# EAGLE board Sensor Board (EAGLE 6.4)
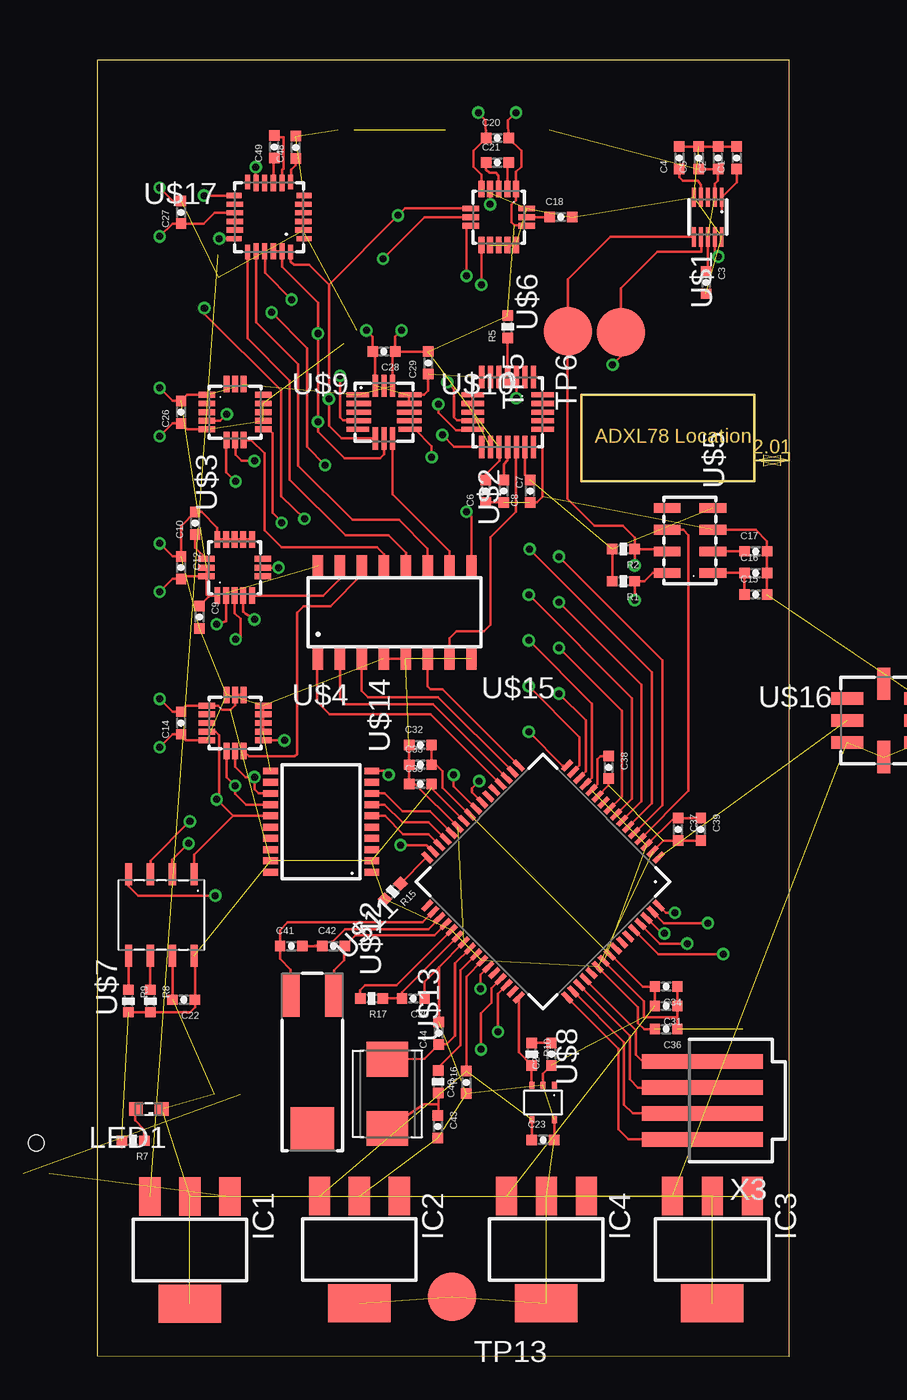
[diagram p0: board, top side]
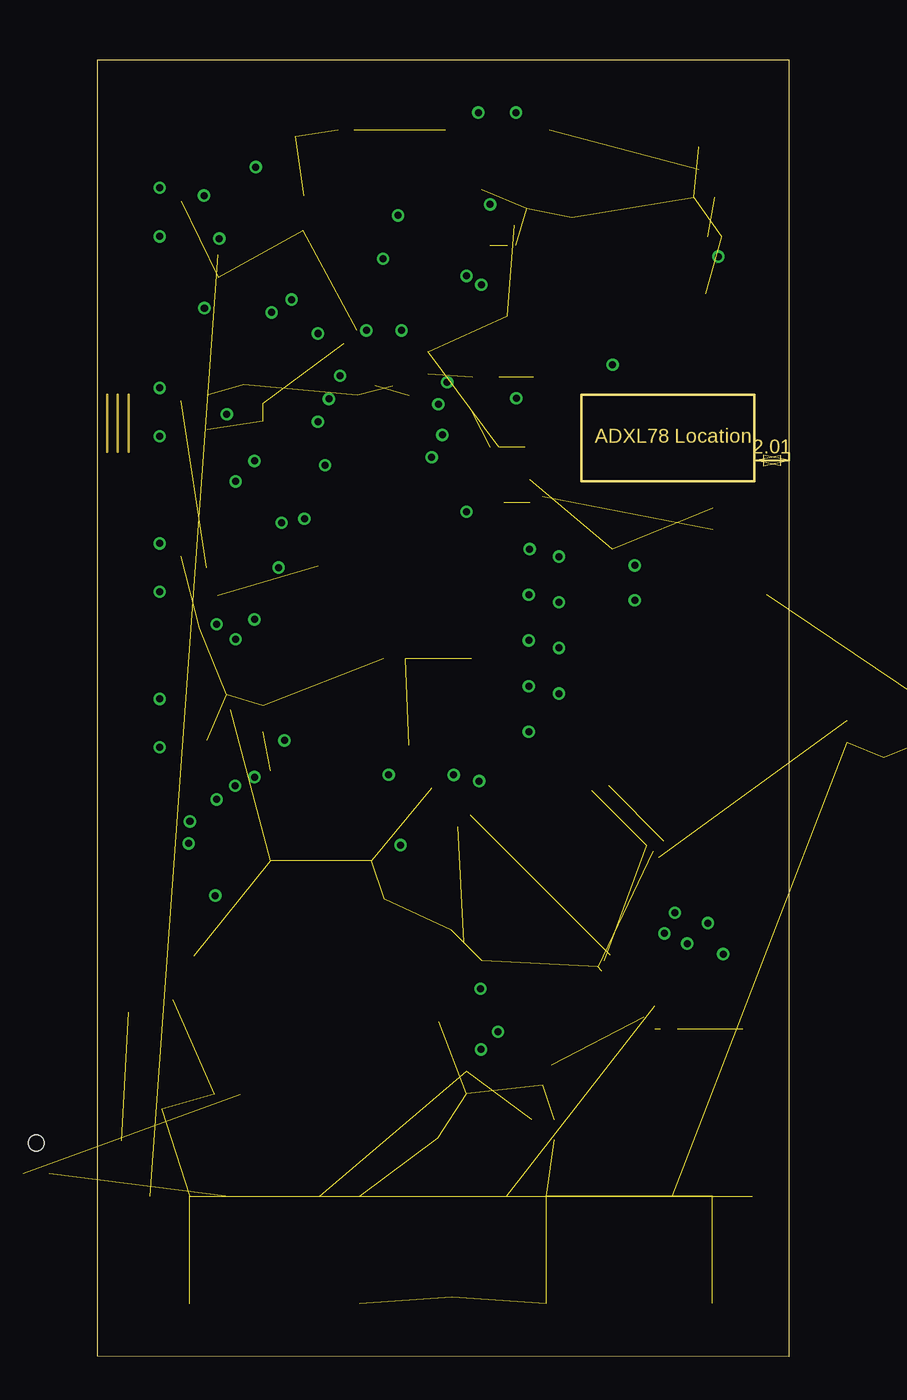
[diagram p1: board, inner layer Route2]
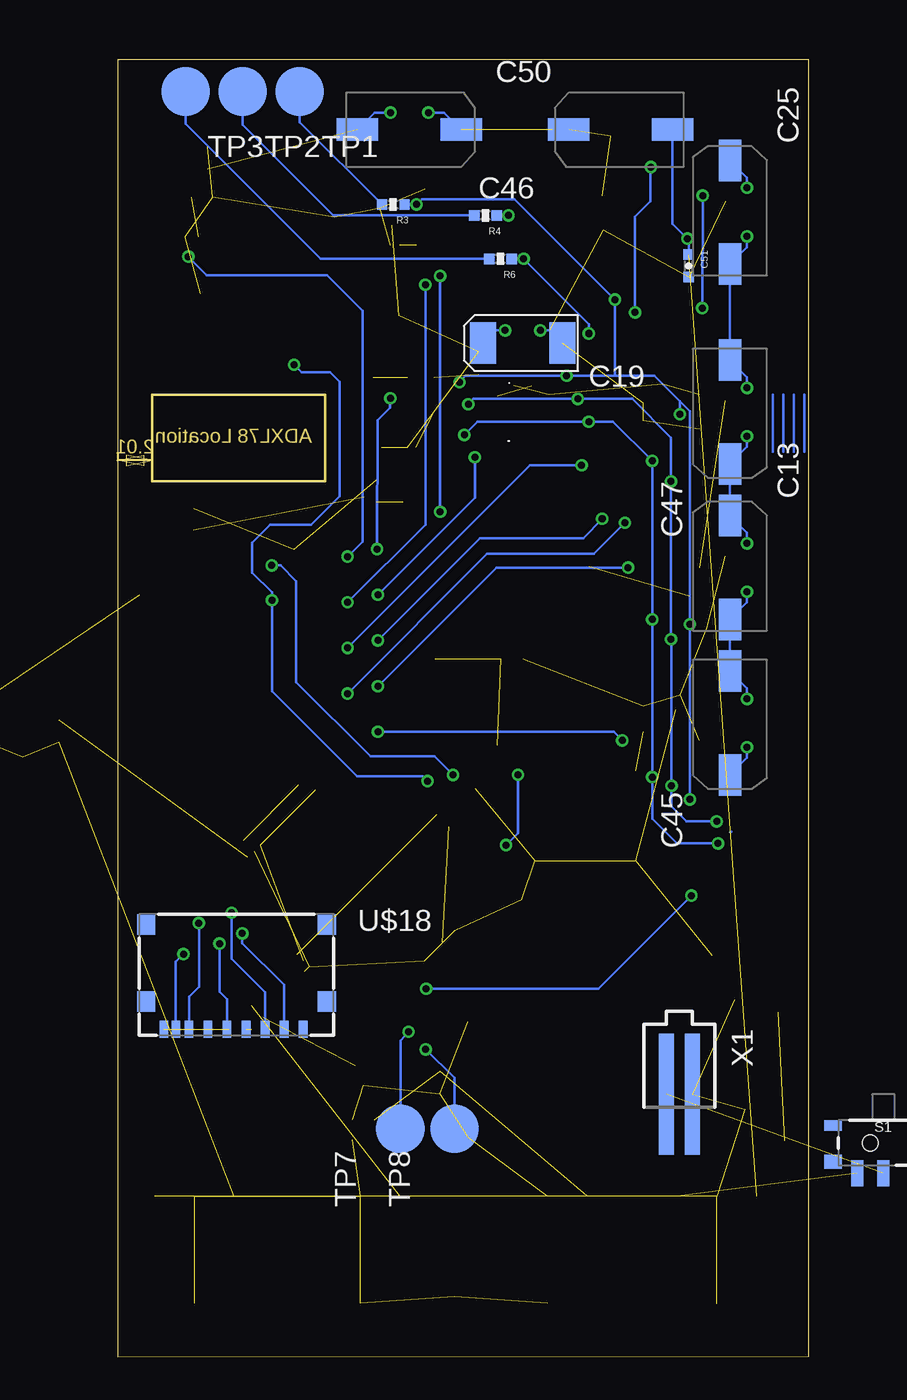
[diagram p2: board, bottom side, seen from below]

Size 40.01 x 75.03 mm. Coordinates in mm from the lower left corner, seen from the top.
Outline: 40,0 0,0.03 0,75.03 40,75.03 40,0
Outline: 28,55.63 28,50.63 38,50.63 38,55.63 28,55.63
Copper layers (1*2*15*16): Top 0.035mm / dielectric 0.2mm / Route2 0.0175mm / dielectric 1.1mm / Route15 0.0175mm / dielectric 0.2mm / Bottom 0.035mm
Design rules "SeeedStudio_DRU_no_angle_20130527": minimum track width 6mil, minimum drill 12mil, track to track 6mil, track to pad 6mil, pad to pad 6mil, via to via 6mil, smd to smd 0mil, copper to edge 10mil, drill to drill 10mil, minimum pad ring 6mil, minimum via ring 6mil, stop-mask expansion 2mil, vias tented up to drill 25mil, thermal gap 10mil

## Footprints (pad centres in the part's own frame; a part is rotated, then mirrored left to right if it is on the bottom)
0402-CAP = smd 0.6 x 0.6: 1 -0.65,0; 2 0.65,0
4.3X7.3SMD = smd 2.4 x 1.3: P$1 -3,0; P$2 3,0
EIA6032 = smd 1.5 x 2.4: P$1 -2.3,0; P$2 2.3,0
SOT223 = smd 1.219 x 2.235: 1 -2.311,-3.099; 2 0,-3.099; 3 2.311,-3.099 | smd 3.6 x 2.2: 4 0,3.099
LED_SML0603 = smd 0.8 x 0.8: A 0.75,0; C -0.75,0
0402-RES = smd 0.6 x 0.6: 1 -0.65,0; 2 0.65,0
SWITCH-SPST-SMD-A = smd 0.7 x 1.5: 1 -2.25,-1.75; 2 -0.75,-1.75; 3 2.25,-1.75 | smd 1 x 0.6: GND1 -3.65,1; GND3 3.65,1 | smd 1 x 0.8: GND2 -3.65,-1.1; GND4 3.65,-1.1 | hole 0.9: -1.5,0; 1.5,0
TESTPAD(ROUND) = smd 2.794 x 2.794: P$1 0,0
DFN-10(2X2)_HS = smd 1.1 x 0.225: P$1 -1.15,0.8; P$2 -1.15,0.4; P$3 -1.15,0; P$4 -1.15,-0.4; P$5 -1.15,-0.8; P$6 1.15,-0.8; P$7 1.15,-0.4; P$8 1.15,0; P$9 1.15,0.4; P$10 1.15,0.8
QFN-24(4X4)_HS = smd 1.3 x 0.3: P$1 -2.025,1.5; P$2 -2.025,1; P$3 -2.025,0.5; P$4 -2.025,0; P$5 -2.025,-0.5; P$6 -2.025,-1; P$7 -2.025,-1.5; P$13 2.025,-1.5; P$14 2.025,-1; P$15 2.025,-0.5; P$16 2.025,0; P$17 2.025,0.5; P$18 2.025,1; P$19 2.025,1.5 | smd 0.3 x 1.3: P$8 -1,-2.025; P$9 -0.5,-2.025; P$10 0,-2.025; P$11 0.5,-2.025; P$12 1,-2.025; P$20 1,2.025; P$21 0.5,2.025; P$22 0,2.025; P$23 -0.5,2.025; P$24 -1,2.025
LGA-16(3X3)_HS = smd 0.95 x 0.34: P$1 -1.625,1; P$2 -1.625,0.5; P$3 -1.625,0; P$4 -1.625,-0.5; P$5 -1.625,-1; P$9 1.625,-1; P$10 1.625,-0.5; P$11 1.625,0; P$12 1.625,0.5; P$13 1.625,1 | smd 0.34 x 0.95: P$6 -0.5,-1.625; P$7 0,-1.625; P$8 0.5,-1.625; P$14 0.5,1.625; P$15 0,1.625; P$16 -0.5,1.625
LGA-8(5X3)_HS = smd 0.55 x 1.55: P$1 -1.875,-1.325; P$2 -0.625,-1.325; P$3 0.625,-1.325; P$4 1.875,-1.325; P$5 1.875,1.325; P$6 0.625,1.325; P$7 -0.625,1.325; P$8 -1.875,1.325
SOIC-8(5X6.2) = smd 1.27 x 0.41: P$1 -2.365,1.905; P$2 -2.365,0.635; P$3 -2.365,-0.635; P$4 -2.365,-1.905; P$5 2.365,-1.905; P$6 2.365,-0.635; P$7 2.365,0.635; P$8 2.365,1.905
SOT323-5L = smd 0.4 x 0.3: P$1 1,-0.65; P$2 1,0; P$3 1,0.65; P$4 -1,0.65; P$5 -1,-0.65
LGA-16(3X3.25)_HS = smd 1.32 x 0.3: P$1 -1.513,1; P$5 -1.513,-1; P$9 1.513,-1; P$13 1.513,1 | smd 1.425 x 0.3: P$2 -1.462,0.5; P$3 -1.462,0; P$4 -1.462,-0.5; P$10 1.462,-0.5; P$11 1.462,0; P$12 1.462,0.5 | smd 0.3 x 1.3: P$6 -0.5,-1.525; P$7 0,-1.525; P$8 0.5,-1.525; P$14 0.5,1.525; P$15 0,1.525; P$16 -0.5,1.525
S-PQFP-G64 = smd 0.75 x 0.27: P$1 -5.725,3.75; P$2 -5.725,3.25; P$3 -5.725,2.75; P$4 -5.725,2.25; P$5 -5.725,1.75; P$6 -5.725,1.25; P$7 -5.725,0.75; P$8 -5.725,0.25; P$9 -5.725,-0.25; P$10 -5.725,-0.75; P$11 -5.725,-1.25; P$12 -5.725,-1.75; P$13 -5.725,-2.25; P$14 -5.725,-2.75; P$15 -5.725,-3.25; P$16 -5.725,-3.75; P$33 5.725,-3.75; P$34 5.725,-3.25; P$35 5.725,-2.75; P$36 5.725,-2.25; P$37 5.725,-1.75; P$38 5.725,-1.25; P$39 5.725,-0.75; P$40 5.725,-0.25; P$41 5.725,0.25; P$42 5.725,0.75; P$43 5.725,1.25; P$44 5.725,1.75; P$45 5.725,2.25; P$46 5.725,2.75; P$47 5.725,3.25; P$48 5.725,3.75 | smd 0.27 x 0.75: P$17 -3.75,-5.725; P$18 -3.25,-5.725; P$19 -2.75,-5.725; P$20 -2.25,-5.725; P$21 -1.75,-5.725; P$22 -1.25,-5.725; P$23 -0.75,-5.725; P$24 -0.25,-5.725; P$25 0.25,-5.725; P$26 0.75,-5.725; P$27 1.25,-5.725; P$28 1.75,-5.725; P$29 2.25,-5.725; P$30 2.75,-5.725; P$31 3.25,-5.725; P$32 3.75,-5.725; P$49 3.75,5.725; P$50 3.25,5.725; P$51 2.75,5.725; P$52 2.25,5.725; P$53 1.75,5.725; P$54 1.25,5.725; P$55 0.75,5.725; P$56 0.25,5.725; P$57 -0.25,5.725; P$58 -0.75,5.725; P$59 -1.25,5.725; P$60 -1.75,5.725; P$61 -2.25,5.725; P$62 -2.75,5.725; P$63 -3.25,5.725; P$64 -3.75,5.725
CYLINDRICAL-(1.9DIAX6L) = smd 2.5 x 1: P$1 3.875,1.25; P$2 3.875,-1.25 | smd 2.5 x 2.5: P$3 -3.875,0
2-SMD = smd 2 x 2.4: P$1 -2,0; P$2 2,0
TSSOP-(PW)-20 = smd 0.4 x 0.85: P$1 -2.925,-2.925; P$2 -2.275,-2.925; P$3 -1.625,-2.925; P$4 -0.975,-2.925; P$5 -0.325,-2.925; P$6 0.325,-2.925; P$7 0.975,-2.925; P$8 1.625,-2.925; P$9 2.275,-2.925; P$10 2.925,-2.925; P$11 2.925,2.925; P$12 2.275,2.925; P$13 1.625,2.925; P$14 0.975,2.925; P$15 0.325,2.925; P$16 -0.325,2.925; P$17 -0.975,2.925; P$18 -1.625,2.925; P$19 -2.275,2.925; P$20 -2.925,2.925
SOIC-16 = smd 0.6 x 1.27: P$1 -4.445,-2.675; P$2 -3.175,-2.675; P$3 -1.905,-2.675; P$4 -0.635,-2.675; P$5 0.635,-2.675; P$6 1.905,-2.675; P$7 3.175,-2.675; P$8 4.445,-2.675; P$9 4.445,2.675; P$10 3.175,2.675; P$11 1.905,2.675; P$12 0.635,2.675; P$13 -0.635,2.675; P$14 -1.905,2.675; P$15 -3.175,2.675; P$16 -4.445,2.675
LCC-8(5X5)_HS = smd 1.87 x 0.735: P$1 -2.117,1.27; P$2 -2.117,0; P$3 -2.117,-1.27; P$5 2.117,-1.27; P$6 2.117,0; P$7 2.117,1.27 | smd 0.735 x 1.87: P$4 0,-2.117; P$8 0,2.117
LGA-24(4X4)_HS = smd 0.85 x 0.3: P$1 -2.025,1.25; P$6 -2.025,-1.25; P$13 2.025,-1.25; P$18 2.025,1.25 | smd 0.95 x 0.3: P$2 -1.975,0.75; P$3 -1.975,0.25; P$4 -1.975,-0.25; P$5 -1.975,-0.75; P$14 1.975,-0.75; P$15 1.975,-0.25; P$16 1.975,0.25; P$17 1.975,0.75 | smd 0.3 x 0.85: P$7 -1.25,-2.025; P$12 1.25,-2.025; P$19 1.25,2.025; P$24 -1.25,2.025 | smd 0.3 x 0.95: P$8 -0.75,-1.975; P$9 -0.25,-1.975; P$10 0.25,-1.975; P$11 0.75,-1.975; P$20 0.75,1.975; P$21 0.25,1.975; P$22 -0.25,1.975; P$23 -0.75,1.975
SD-105027-101 = smd 0.5 x 1: P$1 3.85,-6.66; P$2 2.75,-6.66; P$3 1.65,-6.66; P$4 0.55,-6.66; P$5 -0.55,-6.66; P$6 -1.65,-6.66; P$7 -2.75,-6.66; P$8 -3.51,-6.66; P$9 -4.21,-6.66 | smd 1.05 x 1.2: P$10 -5.225,-0.6; P$11 -5.225,-5.05; P$12 5.225,-5.05; P$13 5.225,-0.6
87438-02 = smd 7 x 0.85: 1 0,0.75; 2 0,-0.75
87438-04 = smd 7 x 0.85: 1 0,2.25; 2 0,0.75; 3 0,-0.75; 4 0,-2.25

## Placement (x,y rotation side)
C1  100nF  [0402-CAP]  36.98,69.35 90 top
C2  1uF  [0402-CAP]  35.89,69.34 90 top
C3  100nF  [0402-CAP]  35.2,62.13 270 top
C4  100nF  [0402-CAP]  33.66,69.34 90 top
C5  100nF  [0402-CAP]  34.78,69.34 90 top
C6  1uF  [0402-CAP]  22.45,50.06 90 top
C7  100nF  [0402-CAP]  23.5,50.06 270 top
C8  1uF  [0402-CAP]  25.02,50.06 90 top
C9  100nF  [0402-CAP]  5.89,42.77 270 top
C10  10nF  [0402-CAP]  5.64,48.21 90 top
C12  10uF  [0402-CAP]  4.83,45.64 270 top
C13  100nF  [4.3X7.3SMD]  4.57,45.64 90 bottom
C14  100nF  [0402-CAP]  4.83,36.65 90 top
C15  100nF  [0402-CAP]  38.07,44.08 0 top
C16  10uF  [0402-CAP]  38.07,45.32 0 top
C17  100nF  [0402-CAP]  38.07,46.59 0 top
C18  4.7uF  [0402-CAP]  26.8,65.91 0 top
C19  1uF  [EIA6032]  16.56,58.62 0 bottom
C20  100nF  [0402-CAP]  23.13,70.48 0 top
C21  0.22uF  [0402-CAP]  23.13,69.06 0 top
C22  0.1uF  [0402-CAP]  4.98,20.65 180 top
C23  0.1uF  [0402-CAP]  25.77,12.55 0 top
C24  1uF  [0402-CAP]  26.26,17.5 90 top
C25  10uF  [4.3X7.3SMD]  4.57,66.19 90 bottom
C26  100nF  [0402-CAP]  4.83,54.64 90 top
C27  100nF  [0402-CAP]  4.83,66.19 90 top
C28  0.1uF  [0402-CAP]  16.56,58.14 180 top
C29  0.1uF  [0402-CAP]  19.13,57.48 90 top
C30  0.1uF  [0402-CAP]  18.26,20.72 180 top
C31  0.1uF  [0402-CAP]  32.89,20.29 180 top
C32  0.1uF  [0402-CAP]  18.67,35.38 0 top
C33  2.2uF  [0402-CAP]  18.67,34.24 0 top
C34  1.0uF  [0402-CAP]  32.89,21.41 180 top
C35  0.01uF  [0402-CAP]  18.67,33.12 0 top
C36  0.1uF  [0402-CAP]  32.89,18.95 180 top
C37  0.01uF  [0402-CAP]  33.58,30.51 270 top
C38  0.1uF  [0402-CAP]  29.57,34.09 270 top
C39  0.01uF  [0402-CAP]  34.9,30.51 270 top
C40  1.0uF  [0402-CAP]  21.34,15.88 90 top
C41  24pF  [0402-CAP]  11.2,23.75 0 top
C42  24pF  [0402-CAP]  13.64,23.75 0 top
C43  10pF  [0402-CAP]  19.68,13.31 270 top
C44  10pF  [0402-CAP]  19.74,18.72 90 top
C45  10uF  [4.3X7.3SMD]  4.57,36.65 270 bottom
C46  10uF  [4.3X7.3SMD]  23.13,70.97 0 bottom
C47  10uF  [4.3X7.3SMD]  4.57,54.64 270 bottom
C48  4.7uF  [0402-CAP]  11.46,69.95 90 top
C49  0.22uF  [0402-CAP]  10.21,69.98 90 top
C50  10uF  [4.3X7.3SMD]  10.9,70.97 180 bottom
C51  100nF  [0402-CAP]  6.96,63.09 270 bottom
C52  0.1uF  [0402-CAP]  49.53,36.98 90 top  (outside the outline)
C53  4.7uF  [4.3X7.3SMD]  50.98,37.01 90 top  (outside the outline)
IC1  LT1963EST-1.5  [SOT223]  5.33,6.17 180 top
IC2  LT1963EST-1.5  [SOT223]  15.14,6.2 180 top
IC3  LT1963EST-1.5  [SOT223]  35.56,6.2 180 top
IC4  LT1963EST-1.5  [SOT223]  25.96,6.2 180 top
LED1  Green  [LED_SML0603]  2.96,14.33 180 top
R1  10k  [0402-RES]  30.43,44.86 180 top
R2  10k  [0402-RES]  30.43,46.71 180 top
R3  0  [0402-RES]  24.05,66.65 180 bottom
R4  0  [0402-RES]  18.72,66.01 180 bottom
R5  4.7k  [0402-RES]  23.72,59.56 90 top
R6  0  [0402-RES]  17.86,63.5 180 bottom
R7  10k  [0402-RES]  2.04,12.5 180 top
R8  10k  [0402-RES]  3.05,20.57 270 top
R9  10k  [0402-RES]  1.78,20.57 270 top
R10  200  [0402-RES]  25.11,17.5 270 top
R15  1M  [0402-RES]  17.06,26.91 225 top
R16  0  [0402-RES]  19.7,15.9 270 top
R17  10k  [0402-RES]  15.85,20.73 180 top
S1  Power  [SWITCH-SPST-SMD-A]  -5.05,12.37 0 bottom
TP1  TESTPAD(ROUND)  [TESTPAD(ROUND)]  29.46,73.18 0 bottom
TP2  TESTPAD(ROUND)  [TESTPAD(ROUND)]  32.77,73.18 0 bottom
TP3  TESTPAD(ROUND)  [TESTPAD(ROUND)]  36.07,73.18 0 bottom
TP5  TESTPAD(ROUND)  [TESTPAD(ROUND)]  27.21,59.31 270 top
TP6  TESTPAD(ROUND)  [TESTPAD(ROUND)]  30.28,59.26 270 top
TP7  TESTPAD(ROUND)  [TESTPAD(ROUND)]  23.65,13.18 270 bottom
TP8  TESTPAD(ROUND)  [TESTPAD(ROUND)]  20.52,13.18 270 bottom
TP13  TESTPAD(ROUND)  [TESTPAD(ROUND)]  20.5,3.48 0 top
U$1  MAG3110_HS  [DFN-10(2X2)_HS]  35.31,65.91 270 top
U$2  FXAS21000_HS  [QFN-24(4X4)_HS]  23.72,54.64 270 top
U$3  L3GD20H_HS  [LGA-16(3X3)_HS]  7.92,45.64 90 top
U$4  LPS331AP_HS  [LGA-16(3X3)_HS]  7.95,36.65 0 top
U$5  MPL3115A2_HS  [LGA-8(5X3)_HS]  34.28,47.21 90 top
U$6  LSM303D_HS  [LGA-16(3X3)_HS]  23.2,65.91 270 top
U$7  ADT7310  [SOIC-8(5X6.2)]  3.69,25.55 270 top
U$8  STLM20  [SOT323-5L]  25.77,14.71 90 top
U$9  LIS3DH  [LGA-16(3X3)_HS]  7.95,54.64 0 top
U$10  ADXL362  [LGA-16(3X3.25)_HS]  16.56,54.64 0 top
U$11  TM4C1233H6PM  [S-PQFP-G64]  25.77,27.48 225 top
U$12  32.768 kHz  [CYLINDRICAL-(1.9DIAX6L)]  12.42,17.04 90 top
U$13  16.000 MHz  [2-SMD]  16.77,15.21 90 top
U$14  TXB0108  [TSSOP-(PW)-20]  12.93,30.95 90 top
U$15  CD74HC138  [SOIC-16]  17.19,43.06 0 top
U$16  ADXL78  [LCC-8(5X5)_HS]  45.49,36.8 180 top  (outside the outline)
U$17  LSM9DS0_HS  [LGA-24(4X4)_HS]  9.92,65.91 180 top
U$18  SD-105027-101  [SD-105027-101]  33.12,25.6 0 bottom
X1  87438-02  [87438-02]  7.49,15.19 270 bottom
X3  87438-04  [87438-04]  34.98,14.82 180 top

## Library data of the parts
C1-C10 C12-C18 C20-C53 R1-R10 R15-R17 TP1-TP3 TP5-TP8 TP13 = Kas-Passives
C19 = SparkFun-Passives
IC1-IC4 = linear-technology; MPN: LT1963EST-1.5; OC_FARNELL: 1663528; OC_NEWARK: 57M7534
LED1 = eagle-ltspice; SPICEMODEL: NONE; SPICEPREFIX: D; SPICETYPE: diode
S1 = SparkFun-Electromechanical
U$1-U$10 U$16 U$17 = Kas-Sensors
U$11 = Kas-Microcontroller
U$12 U$13 = Kas-Crystal
U$14 U$15 = Kas-Buffers & Level Shifters
U$18 = Kas-Connectors
X1 = con-molex; OC_FARNELL: 1711327; OC_NEWARK: unknown
X3 = con-molex; OC_FARNELL: unknown; OC_NEWARK: unknown

## Nets
1.2V: C31.2 C32.2 C33.2 C34.2 IC4.3 U$11.P$25 U$11.P$56
3.0V: C50.P$1 C51.1 IC1.3 U$17.P$18
3.3V: C2.1 C3.1 C5.1 C6.2 C8.2 C9.1 C12.2 C13.P$1 C14.2 C19.P$1 C20.2 C22.1 C23.1 C25.P$1 C26.2 C27.1 C28.1 C29.2 C35.2 C36.2 C37.2 C38.2 C39.2 C40.2 C45.P$1 C46.P$1 C47.P$1 IC2.3 R1.2 R2.2 R5.2 R7.2 R8.2 R9.2 R15.2 R17.2 U$1.P$2 U$1.P$8 U$2.P$15 U$2.P$18 U$3.P$1 U$3.P$15 U$3.P$16 U$4.P$1 U$4.P$14 U$4.P$15 U$5.P$4 U$6.P$1 U$6.P$14 U$7.P$8 U$8.P$4 U$9.P$1 U$9.P$14 U$10.P$1 U$10.P$14 U$11.P$2 U$11.P$11 U$11.P$26 U$11.P$37 U$11.P$42 U$11.P$54 U$14.P$2 U$14.P$19 U$15.P$16 U$17.P$15 U$17.P$16 U$17.P$17 U$18.P$4
5.0V: C52.1 C53.P$1 IC3.3 U$16.P$7 U$16.P$8
ADXL78-ST: U$16.P$4
ANALOG-OUT-ADXL78: U$11.P$1 U$16.P$6
ANALOG-OUT-STLM20: R10.2 U$8.P$3 U$11.P$48
CS-ADT7310: U$7.P$4 U$11.P$43
CS-ADXL362: U$10.P$8 U$15.P$10
CS-ENABLE: U$11.P$17 U$15.P$6
CS-FXAS: U$2.P$17 U$15.P$7
CS-LIS3DH: U$9.P$8 U$15.P$13
CS-LPS331: U$4.P$8 U$15.P$14
CS-LSGD: U$3.P$5 U$15.P$15
CS-LSM9D30-G: U$15.P$12 U$17.P$19
CS-LSM9DS0-XM: U$15.P$11 U$17.P$20
CS-LSM303: U$6.P$8 U$15.P$9
CT-ADT7310: R8.1 U$7.P$6
DEN-L3GD: U$3.P$8
GND: C1.2 C2.2 C3.2 C4.2 C5.2 C6.1 C7.2 C8.1 C9.2 C10.2 C12.1 C13.P$2 C14.1 C15.2 C16.2 C17.2 C18.2 C19.P$2 C20.1 C22.2 C23.2 C24.1 C25.P$2 C26.1 C27.2 C28.2 C29.1 C30.1 C31.1 C32.1 C33.1 C34.1 C35.1 C36.1 C37.1 C38.1 C39.1 C40.1 C43.2 C44.2 C45.P$2 C46.P$2 C47.P$2 C48.2 C50.P$2 C51.2 C52.2 C53.P$2 IC1.2 IC1.4 IC2.2 IC2.4 IC3.2 IC3.4 IC4.2 IC4.4 LED1.C TP13.P$1 U$1.P$5 U$1.P$10 U$2.P$1 U$2.P$5 U$2.P$6 U$2.P$7 U$2.P$8 U$2.P$9 U$2.P$10 U$2.P$14 U$2.P$19 U$2.P$20 U$2.P$21 U$2.P$22 U$2.P$23 U$2.P$24 U$3.P$9 U$3.P$10 U$3.P$11 U$3.P$12 U$3.P$13 U$4.P$5 U$4.P$10 U$4.P$11 U$4.P$12 U$4.P$13 U$4.P$16 U$5.P$3 U$6.P$5 U$6.P$10 U$6.P$12 U$6.P$13 U$6.P$16 U$7.P$7 U$8.P$2 U$8.P$5 U$9.P$5 U$9.P$10 U$9.P$12 U$10.P$12 U$10.P$13 U$10.P$16 U$11.P$3 U$11.P$12 U$11.P$27 U$11.P$39 U$11.P$55 U$14.P$11 U$15.P$4 U$15.P$5 U$15.P$8 U$16.P$3 U$17.P$2 U$17.P$3 U$17.P$4 U$17.P$5 U$17.P$6 U$18.P$6 U$18.P$9 X1.1
INT1-ADXL362: U$10.P$11
INT1-FXAS: U$2.P$3 U$11.P$6
INT1-L3GD: U$3.P$7 U$11.P$15
INT1-MAG3110: U$1.P$9 U$11.P$5
INT1-MPL311: U$5.P$6 U$11.P$4
INT2-ADXL362: U$10.P$9 U$11.P$8
INT2-LIS3DH: U$9.P$9 U$11.P$14
INT2-LPS331: U$4.P$9 U$11.P$16
INT2-LSM303: U$6.P$9 U$11.P$7
INT-ADT7310: R9.1 U$7.P$5
LSM9D-DEN-G: U$17.P$10
LSM9D-DRGY-G: U$17.P$12
LSM9D-INT1-XM: U$11.P$13 U$17.P$13
LSM9D-INT-G: U$11.P$9 U$17.P$11
MISO-A: U$11.P$28 U$14.P$8
MISO-B: R6.1 U$2.P$13 U$3.P$4 U$4.P$7 U$6.P$7 U$7.P$2 U$9.P$7 U$10.P$7 U$14.P$13 U$17.P$22 U$17.P$23
MOSI-A: U$11.P$29 U$14.P$7
MOSI-B: R4.1 U$2.P$12 U$3.P$3 U$4.P$6 U$6.P$6 U$7.P$3 U$9.P$6 U$10.P$6 U$14.P$14 U$17.P$24
N$1: C1.1 U$1.P$1
N$2: C7.1 U$2.P$16
N$3: C4.1 U$1.P$4
N$4: C10.1 U$3.P$14
N$5: C17.1 U$5.P$2
N$6: C18.1 U$6.P$15
N$7: C21.2 U$6.P$2
N$8: C48.1 U$17.P$7
N$9: C24.2 R10.1
N$10: C30.2 R17.1 U$11.P$38
N$11: C42.2 U$11.P$36 U$12.P$2
N$12: C41.1 U$11.P$34 U$12.P$1
N$13: C41.2 C42.1 U$11.P$35
N$14: C43.1 R16.2 U$13.P$1
N$15: C21.1 U$6.P$3
N$16: C44.1 U$11.P$40 U$13.P$2
N$17: R16.1 U$11.P$41
N$18: R15.1 U$11.P$32
N$19: S1.2 X1.2
N$21: C49.2 U$17.P$8
N$22: C49.1 U$17.P$9
N$23: IC1.1 IC2.1 IC3.1 IC4.1 S1.1
N$25: C15.1 C16.1 U$5.P$1
N$27: LED1.A R7.1
N$32: R3.2 TP1.P$1
N$33: R4.2 TP2.P$1
N$34: R6.2 TP3.P$1
RST_B: R5.1 U$2.P$4
SCL-0: R1.1 TP6.P$1 U$1.P$7 U$5.P$8 U$11.P$23
SCLK-A: U$11.P$30 U$14.P$6
SCLK-B: R3.1 U$2.P$11 U$3.P$2 U$4.P$4 U$6.P$4 U$7.P$1 U$9.P$4 U$10.P$4 U$14.P$15 U$17.P$21
SD-CARD-INSERT: U$11.P$60 U$18.P$8
SD-CS: U$11.P$62 U$18.P$2
SD-MISO: U$11.P$63 U$18.P$7
SD-MOSI: U$11.P$64 U$18.P$3
SD-SCLK: U$11.P$61 U$18.P$5
SDA-0: R2.1 TP5.P$1 U$1.P$6 U$5.P$7 U$11.P$24
SPI-ADDR0: U$11.P$20 U$15.P$1
SPI-ADDR1: U$11.P$19 U$15.P$2
SPI-ADDR2: U$11.P$18 U$15.P$3
SPI-ENABLE: U$11.P$31 U$14.P$10
SWCLK: U$11.P$52 X3.4
SWDIO: U$11.P$51 X3.3
SWO: U$11.P$49 X3.1
TDI: U$11.P$50 X3.2
U1RX: TP8.P$1 U$11.P$45
U1TX: TP7.P$1 U$11.P$46

## Tracks (layer width: path | path; a pad name or v marks a point on that pad's centre or on a via)
1.2V  (2 unrouted)
  Top 0.152: C32.2 C33.2 19.58,34.24 19.96,33.86 19.96,32.91 21.52,31.36 U$11.P$25 | C31.2 C34.2 31.55,21.41 29.79,23.16 29.73,23.16 U$11.P$56 29.64,23.22 29.66,23.22
3.0V  (via drill 0.41)  (1 unrouted)
  Top 0.152: v7.04,64.67 U$17.P$18
  Bottom 0.152: C50.P$1 7.9,65.53 v7.04,64.67 6.96,64.59 C51.1
3.3V  (via drill 0.41)  (28 unrouted)
  Top 0.152: 29.18,22.3 31.27,20.22 31.27,19.3 31.62,18.95 C36.2 | R17.2 15.2,20.87 15.19,20.88 15.19,21.21 15.47,21.49 17.3,21.49 U$11.P$37 | C39.2 C37.2 32.73,29.86 U$11.P$2 | U$3.P$16 | v3.58,56.03 4.33,55.29 C26.2 5.18,55.64 U$9.P$1 | U$3.P$15 U$3.P$16 | v3.58,38.05 4.33,37.3 C14.2 5.07,37.65 U$4.P$1 6.98,37.65 7.21,37.41 7.7,37.41 7.95,37.67 U$4.P$15 U$4.P$14 8.43,38.26 | v3.58,44.25 4.33,44.99 C12.2 4.98,45.14 U$3.P$16 | C6.2 22.45,51.03 23.24,51.82 23.24,52.59 U$2.P$15 | C40.2 21.34,21.99 U$11.P$42 | R9.2 R8.2 3.23,19.92 3.52,19.94 5.36,19.94 5.63,20.21 C22.1 5.63,23.15 U$7.P$8 | R7.2 1.42,12.47 1.42,12.14 1.4,12.12 | C38.2 29.57,33.05 U$11.P$11 | R1.2 R2.2 | v17.58,59.36 17.21,58.99 C28.1 | U$10.P$14 17.06,57.99 C28.1 | C29.2 17.22,58.13 C28.1 | v24.21,71.96 23.75,71.5 C20.2 24.51,69.75 24.51,68.84 24.2,68.53 U$6.P$1 24.2,66.88 23.95,66.62 23.95,65.61 24.13,65.43 24.81,65.43 U$6.P$14 | U$11.P$26 19.32,32.87 C35.2 | U$2.P$18 24.72,51.01 C8.2 | U$3.P$1 6.49,44.02 6.42,43.95 | 6.42,43.95 C9.1 | U$3.P$16 6.3,44.07 6.42,43.95 | U$1.P$2 35.71,67.84 35.89,68.02 C2.1 C5.1 | U$1.P$8 35.31,62.88 C3.1 | U$8.P$4 C23.1 | U$17.P$17 U$17.P$16 U$17.P$15 6.76,66.17 6.13,65.54 C27.1 4.33,65.54 v3.58,64.8
  Bottom 0.152: v3.58,56.03 3.58,56.64 C47.P$1 C25.P$1 3.58,64.18 v3.58,64.8 | v3.58,38.05 3.58,38.66 C45.P$1 C13.P$1 3.58,43.63 v3.58,44.25 | C19.P$1 18.12,59.36 v17.58,59.36 | C46.P$1 25.14,71.96 v24.21,71.96
5.0V  (4 unrouted)
ANALOG-OUT-ADXL78  (1 unrouted)
ANALOG-OUT-STLM20
  Top 0.152: U$11.P$48 24.37,17.62 R10.2 25.09,16.84 25.09,15.75 25.12,15.72 U$8.P$3
CS-ADT7310  (via drill 0.41)
  Top 0.152: U$11.P$43 22.15,22.1 v22.15,21.29 | U$7.P$4 1.78,27.23 2.34,26.67 v6.81,26.67
  Bottom 0.152: v22.15,21.29 12.19,21.29 v6.81,26.67
CS-ADXL362
  Top 0.152: U$10.P$8 17.07,53.1 17.07,49.89 20.36,46.59 U$15.P$10
CS-ENABLE
  Top 0.152: U$15.P$6 19.09,38.77 19.25,38.61 19.95,38.61 U$11.P$17
CS-FXAS
  Top 0.152: U$15.P$7 20.36,41.57 20.75,41.96 22.35,41.96 22.73,42.34 22.73,47.4 24.21,48.87 24.21,52.59 U$2.P$17
CS-LIS3DH
  Top 0.152: 16.51,45.77 U$15.P$13 16.56,46.41 16.15,46.81 10.64,46.81 9.65,47.8 9.65,52.25 8.89,53.01 U$9.P$8
CS-LPS331
  Top 0.152: U$4.P$8 8.76,34.72 11.4,34.72 11.53,34.85 11.53,43.03 11.91,43.41 13.46,43.41 15.28,45.23 U$15.P$14
CS-LSGD
  Top 0.152: U$3.P$5 13.03,44.02 14.1,45.09 14.1,45.65 U$15.P$15
CS-LSM9D30-G
  Top 0.152: 8.71,63.84 U$17.P$19 8.67,58.9 11.1,56.46 11.1,50.72 14.35,47.52 16.82,47.52 17.83,46.51 U$15.P$12
CS-LSM9DS0-XM
  Top 0.152: U$17.P$20 9.17,59.85 11.6,57.41 11.6,51.54 14.76,48.41 17.42,48.41 19.09,46.75 U$15.P$11
CS-LSM303  (via drill 0.41)
  Top 0.152: U$15.P$9 21.63,48.58 v21.34,48.87 | U$6.P$8 | U$6.P$8 21.35,65.42 | v21.34,62.51 21.34,65.41 U$6.P$8
  Bottom 0.152: v21.34,48.87 v21.34,62.51
CT-ADT7310
  Top 0.152: U$7.P$6 R8.1
GND  (via drill 0.41)  (56 unrouted)
  Top 0.152: U$3.P$9 U$3.P$10 U$3.P$11 U$3.P$12 U$3.P$13 6.91,47.28 6.91,47.96 6,48.86 C10.2 4.83,48.05 C12.1 4.33,46.29 v3.58,47.04 | U$11.P$55 29.29,22.89 31.6,20.57 31.6,19.63 33.54,19.63 | C34.1 C31.1 33.54,19.63 | C36.1 33.54,19.63 | U$11.P$39 21.17,23.97 19.74,22.53 | C39.1 C37.1 33.33,31.16 U$11.P$3 | U$4.P$5 5.07,35.65 C14.1 4.33,36 v3.58,35.26 | v3.58,53.24 4.33,53.99 C26.1 5.18,53.64 U$9.P$5 | C7.2 C6.1 22.41,49.45 | C30.1 18.91,21.7 19.74,22.53 | C44.2 19.74,22.53 | U$7.P$7 C22.2 | LED1.C | U$5.P$3 38.07,47.83 38.73,47.18 C17.2 C16.2 C15.2 | v15.54,59.36 15.91,58.99 C28.2 16.06,57.99 U$10.P$16 | C29.1 19.13,55.88 18.88,55.64 U$10.P$13 18.02,55.58 U$10.P$12 | v22.02,71.96 22.45,71.53 C20.1 21.74,69.75 21.74,68.84 22.2,68.38 U$6.P$5 | 29.52,34.79 C38.1 29.1,34.74 28.93,34.57 28.93,33.12 U$11.P$12 | C32.1 C33.1 C35.1 18.36,33.12 U$11.P$27 | C8.1 25.41,49.41 25.75,49.75 25.75,52.61 | C4.2 C5.2 C2.2 C1.2 | U$2.P$10 U$2.P$9 U$2.P$8 21.7,56.66 U$2.P$7 U$2.P$6 U$2.P$5 | U$2.P$1 25.75,56.66 U$2.P$24 U$2.P$23 U$2.P$22 U$2.P$21 U$2.P$20 25.75,52.61 | U$2.P$19 25.75,52.61 | U$4.P$13 U$4.P$12 U$4.P$11 U$4.P$10 | U$6.P$12 U$6.P$13 | U$17.P$6 11.89,67.11 U$17.P$5 U$17.P$4 U$17.P$3 U$17.P$2 | U$8.P$5 C23.2 | U$8.P$2 25.77,16.36 C24.1 | U$15.P$4 U$15.P$5 | v3.58,67.61 4.35,66.84 C27.2
  Bottom 0.152: v3.58,53.24 3.58,52.63 C47.P$2 C13.P$2 3.58,47.65 v3.58,47.04 | C45.P$2 3.58,34.64 v3.58,35.26 | C19.P$2 15,59.36 v15.54,59.36 | C46.P$2 21.12,71.96 v22.02,71.96 | C25.P$2 3.58,68.2 v3.58,67.61
  Bottom 0.406: C50.P$2 14.83,70.97
INT1-FXAS  (via drill 0.41)
  Top 0.152: v24.22,55.44 U$2.P$3 | U$11.P$6 32.05,32 32.05,39.6 v24.99,46.71
  Bottom 0.152: v24.99,46.71 24.97,54.15 24.23,54.89 24.23,54.9 v24.22,55.44
INT1-L3GD  (via drill 0.41)
  Top 0.152: v10.46,45.64 U$3.P$7 | v24.94,38.79 27.89,35.84 27.89,34.2 U$11.P$15
  Bottom 0.152: v10.46,45.64 18.09,45.64 v24.94,38.79
INT1-MAG3110  (via drill 0.41)
  Top 0.152: U$1.P$9 35.69,64.81 35.71,64.62 35.71,63.83 v35.92,63.63 | U$11.P$5 31.08,30.29 32.69,31.9 32.69,40.28 v26.7,46.28
  Bottom 0.152: v26.7,46.28 25.83,47.14 25.83,60.5 27.89,62.56 34.85,62.56 v35.92,63.63
INT1-MPL311
  Top 0.152: U$11.P$4 34.19,32.72 34.19,47.52 33.88,47.83 U$5.P$6
INT2-ADXL362  (via drill 0.41)
  Top 0.152: v19.33,52.03 19.33,52.65 18.35,53.64 U$10.P$9 | U$11.P$8 30.91,32.27 30.91,38.1 v24.94,44.07
  Bottom 0.152: v19.33,52.03 19.33,49.68 v24.94,44.07
INT2-LIS3DH  (via drill 0.41)
  Top 0.152: v26.7,38.35 28.25,36.8 28.25,33.85 U$11.P$14 | v10.64,48.23 10.64,48.29 10.11,48.82 10.11,53.42 9.89,53.64 U$9.P$9
  Bottom 0.152: v10.64,48.23 12.45,46.43 18.62,46.43 v26.7,38.35
INT2-LPS331  (via drill 0.41)
  Top 0.152: U$4.P$9 v10.8,35.65 | U$11.P$16 26.9,34.18 v24.94,36.14
  Bottom 0.152: v24.94,36.14 11.3,36.14 v10.8,35.65
INT2-LSM303  (via drill 0.41)
  Top 0.152: U$11.P$7 31.47,32.13 31.47,38.86 v26.7,43.64 | U$6.P$9 v22.2,62
  Bottom 0.152: v26.7,43.64 22.2,48.13 v22.2,62
INT-ADT7310
  Top 0.152: U$7.P$5 R9.1
LSM9D-INT1-XM  (via drill 0.41)
  Top 0.152: U$17.P$13 | U$17.P$13 | U$17.P$13 v6.15,67.16 | v24.94,41.43 28.6,37.77 28.6,33.5 U$11.P$13 | v11.96,48.46 10.61,49.77 10.61,55.89 6.17,60.33 v6.17,60.66
  Bottom 0.152: v6.17,60.66 v6.15,67.16 | v11.96,48.46 13.06,47.35 19.02,47.35 v24.94,41.43
LSM9D-INT-G  (via drill 0.41)
  Top 0.152: v9.14,68.81 9.14,67.97 U$17.P$11 | U$11.P$9 30.33,32.39 30.33,37.36 v26.7,41 | v13.16,51.56 12.1,52.64 12.13,57.47 12.13,58.33 v10.06,60.4
  Bottom 0.152: v13.16,51.56 16.13,51.56 v26.7,41 | v10.06,60.4 10.06,65.94 9.17,66.83 9.17,68.78 v9.14,68.81
MISO-A
  Top 0.152: U$14.P$8 16.59,32.58 17.63,31.55 19.23,31.55 U$11.P$28
MISO-B  (via drill 0.41)
  Top 0.152: U$3.P$4 8.43,43.09 8.43,43.08 8.56,42.98 v9.07,42.65 | U$7.P$2 4.32,28.76 v5.26,29.69 | U$9.P$7 7.95,52.73 7.98,52.71 7.98,52.17 8.33,51.82 v9.07,51.82 | U$2.P$13 22.2,52.63 20.62,52.63 v19.94,53.31 | U$17.P$22 U$17.P$23 10.67,63.04 12.74,60.97 v12.74,59.18 v12.74,54.08 12.74,53.51 14.28,51.97 16.33,51.97 16.56,52.2 U$10.P$7 | U$14.P$13 9.99,32.59 9.3,32.59 9.07,32.82 v9.07,33.53 8.56,33.53 7.95,34.14 U$4.P$7 | U$6.P$7 18.92,65.91 v16.51,63.5
  Bottom 0.152: v5.26,29.69 7.64,29.69 9.07,31.12 v9.07,33.53 v9.07,42.65 v9.07,51.82 11.33,54.08 v12.74,54.08 19.18,54.08 v19.94,53.31 | v12.74,59.18 12.74,59.73 v16.51,63.5 R6.1
MOSI-A
  Top 0.152: U$14.P$7 16.61,31.93 17.63,30.91 19.16,30.91 U$11.P$29
MOSI-B  (via drill 0.41)
  Top 0.152: U$9.P$6 7.44,52.91 7.44,51.16 v7.98,50.63 | 16.1,52.67 U$10.P$6 | U$3.P$3 7.92,43.01 8.27,42.67 8.27,41.54 v7.98,41.5 | U$7.P$3 3.05,28.68 v5.33,30.96 | U$2.P$12 21.66,53.59 20.73,53.59 19.71,54.61 v19.71,55.09 | 16.03,53.14 U$10.P$6 | U$10.P$6 14.11,53.11 13.38,53.84 v13.38,55.4 13.38,62.01 | U$14.P$14 8.58,31.93 7.95,32.56 v7.95,33.03 7.45,33.53 U$4.P$6 | 13.38,62.01 12.24,63.14 11.35,63.14 11.17,63.33 U$17.P$24 | U$6.P$6 17.79,66.41 v17.38,66.01 13.38,62.01
  Bottom 0.152: v5.33,30.96 7.09,30.96 7.95,31.83 v7.95,33.03 7.95,41.48 v7.98,41.5 v7.98,50.63 7.98,53.16 10.21,55.4 v13.38,55.4 19.41,55.4 v19.71,55.09 | R4.1 17.64,66.01 v17.38,66.01
N$1
  Top 0.152: 36.12,67.01 36.12,66.28 U$1.P$1 36.98,67.94 C1.1
N$2
  Top 0.152: C7.1 23.5,51.61 23.72,51.84 U$2.P$16
N$3
  Top 0.152: C4.1 33.66,68.22 33.86,68.02 34.72,68.02 34.91,67.79 U$1.P$4
N$4
  Top 0.152: C10.1 5.64,46.8 U$3.P$14
N$5
  Top 0.152: U$5.P$2 C17.1
N$6
  Top 0.152: U$6.P$15 C18.1
N$7
  Top 0.152: C21.2 23.7,68.99 U$6.P$2
N$8
  Top 0.152: C48.1 11.46,68.91 11.2,68.66 11.2,67.97 U$17.P$7
N$9
  Top 0.152: R10.1 C24.2
N$10
  Top 0.152: R17.1 17.6,20.73 C30.2 17.61,21.09 U$11.P$38
N$11
  Top 0.152: U$12.P$2 13.67,22.36 14.25,22.94 14.25,23.71 C42.2 14.93,24.38 19.48,24.38 U$11.P$36
N$12
  Top 0.152: U$11.P$34 18.81,25.12 11,25.12 10.55,24.67 C41.1 10.54,23.01 11.17,22.38 U$12.P$1
N$13
  Top 0.152: C41.2 12.42,23.75 | 12.42,23.75 C42.1 | U$11.P$35 19.13,24.74 14.33,24.74 13.61,24.03 12.42,23.75
N$14
  Top 0.152: R16.2 19.71,14.61 | 19.71,14.61 C43.1 | U$13.P$1 18.87,14.61 19.71,14.61
N$15
  Top 0.152: C21.1 22.48,68.66 22.66,68.48 23.04,68.48 23.2,68.31 U$6.P$3
N$16
  Top 0.152: 21.54,23.6 U$11.P$40 20.68,22.75 20.68,18.57 20.18,18.07 C44.1 18.9,17.23 U$13.P$2
N$17
  Top 0.152: 21.89,23.26 U$11.P$41 20.98,22.34 20.98,18.01 19.7,16.73 R16.1
N$18
  Top 0.152: U$11.P$32 19.03,28.88 R15.1
N$19  (1 unrouted)
N$21
  Top 0.152: C49.2 10.53,70.54 10.74,70.54 10.74,68.71 10.67,68.66 10.67,68.04 U$17.P$8
N$22
  Top 0.152: C49.1 10.19,68.81 10.19,67.91 U$17.P$9
N$23  (4 unrouted)
N$24
  Bottom 0.152: 4.5,30.38 4.55,30.33
N$25
  Top 0.152: U$5.P$1 37.41,45.34 C16.1 C15.1
N$26
  Bottom 0.152: 0.25,55.65 0.25,52.35
N$27
  Top 0.152: LED1.A 2.18,14.3 2.18,14.17 2.16,14.15 2.16,13.67 2.69,13.13 R7.1
N$28
  Route2 0.152: 0.56,55.65 0.56,52.35
N$29
  Route2 0.152: 1.17,55.65 1.17,52.35 | 1.78,55.65 1.78,52.35
  Bottom 0.152: 0.86,55.65 0.86,52.35 | 1.47,55.65 1.47,52.35 | 2.08,55.65 2.08,52.35
N$32
  Bottom 0.152: R3.2 29.46,71.41 TP1.P$1
N$33
  Bottom 0.152: R4.2 27.53,66.01 32.77,71.25 TP2.P$1
N$34
  Bottom 0.152: R6.2 28.25,63.5 36.07,71.32 TP3.P$1
RST_B
  Top 0.152: U$2.P$4 R5.1
SCL-0  (via drill 0.41)
  Top 0.152: U$11.P$23 21.67,32.65 21.67,32.89 v22.07,33.3 | v31.08,43.76 R1.1 31.64,44.86 32.12,45.33 U$5.P$8 | v29.79,57.38 30.28,57.86 TP6.P$1 30.28,61.8 32.39,63.91 34.93,63.91 U$1.P$7
  Bottom 0.152: v29.79,57.38 29.36,56.95 27.71,56.95 27.15,56.39 27.15,49.76 28.8,48.11 31.17,48.11 32.21,47.07 32.21,45.33 31.08,44.2 v31.08,43.76 31.08,38.49 26.16,33.58 22.35,33.58 v22.07,33.3
SCLK-A
  Top 0.152: U$11.P$30 19.14,30.23 17.68,30.23 16.62,31.28 U$14.P$6
SCLK-B  (via drill 0.41)
  Top 0.152: U$9.P$4 6.34,54.05 | U$3.P$2 7.42,42.54 v6.88,42.37 | U$7.P$1 5.59,29.03 7.84,31.28 | U$4.P$4 6.83,36.15 7.04,35.94 7.04,32.39 v6.88,32.23 7.84,31.28 | U$14.P$15 7.84,31.28 | U$9.P$4 | U$2.P$11 21.68,54.15 20.8,54.15 20.62,54.33 20.62,55.96 v20.22,56.36 | U$17.P$21 9.68,62.69 v11.22,61.14 | v14.02,56.74 14.02,54.33 14.2,54.15 15.08,54.15 U$10.P$4 | U$9.P$4 7.09,54.14 v7.47,54.51 | U$6.P$4 v22.71,66.65
  Bottom 0.152: v6.88,32.23 v6.88,42.37 6.88,54.69 7.46,55.26 | 11.22,56.74 8.94,56.74 7.46,55.26 | 11.22,56.74 v14.02,56.74 19.86,56.74 v20.22,56.36 | 11.22,56.74 v11.22,61.14 17.04,66.95 22.4,66.95 v22.71,66.65 R3.1 | v7.47,54.51 7.47,55.26 7.46,55.26
SD-CARD-INSERT  (via drill 0.41)
  Top 0.152: U$11.P$60 32.44,23.29 v36.2,23.29
  Bottom 0.152: v36.2,23.29 36.63,22.85 U$18.P$8
SD-CS  (via drill 0.41)
  Top 0.152: U$11.P$62 32.64,24.5 v32.79,24.49
  Bottom 0.152: U$18.P$2 30.37,21.51 32.79,23.93 v32.79,24.49
SD-MISO  (via drill 0.41)
  Top 0.152: U$11.P$63 32.77,25.08 v35.31,25.08
  Bottom 0.152: U$18.P$7 35.87,20.82 35.28,21.41 35.28,25.06 v35.31,25.08
SD-MOSI  (via drill 0.41)
  Top 0.152: U$11.P$64 32.87,25.69 v33.4,25.69
  Bottom 0.152: U$18.P$3 31.47,21.08 33.4,23.01 v33.4,25.69
SD-SCLK  (via drill 0.41)
  Top 0.152: U$11.P$61 32.54,23.9 v34.11,23.9
  Bottom 0.152: U$18.P$5 33.67,20.67 34.11,21.11 v34.11,23.9
SDA-0  (via drill 0.41)
  Top 0.152: R2.1 32.26,46.71 U$5.P$7 | v31.08,45.77 R2.1 | U$11.P$24 20.6,33 v20.6,33.66 | 27.25,59.77 TP5.P$1 | TP5.P$1 27.21,62.31 29.67,64.76 U$1.P$6 | TP5.P$1 27.18,59.27 27.18,49.63 28.75,48.06 30.38,48.06 31.08,47.36 R2.1
  Bottom 0.152: v31.08,45.77 30.58,45.77 29.67,44.86 29.67,39.01 25.38,34.72 21.67,34.72 v20.6,33.66
SPI-ADDR0
  Top 0.152: 12.68,40.13 12.74,40.2 U$15.P$1 12.7,40.34 12.7,37.87 13.41,37.16 19.27,37.16 U$11.P$20
SPI-ADDR1
  Top 0.152: U$15.P$2 14.01,38.06 14.33,37.74 19.39,37.74 U$11.P$19
SPI-ADDR2
  Top 0.152: U$15.P$3 15.28,38.52 15.65,38.15 19.7,38.15 U$11.P$18
SPI-ENABLE  (via drill 0.41)
  Top 0.152: v17.53,29.59 19.04,29.59 U$11.P$31 | U$14.P$10 16.12,33.88 16.61,33.88 v16.84,33.67
  Bottom 0.152: v16.84,33.67 16.84,30.28 v17.53,29.59
SWCLK
  Top 0.152: U$11.P$52 28.45,21.62 28.45,21.56 31.14,18.87 31.14,17.48 31.55,17.07 X3.4
SWDIO
  Top 0.152: U$11.P$51 30.79,18.58 30.79,16.05 31.27,15.57 X3.3
SWO
  Top 0.152: U$11.P$49 30.12,17.82 30.12,13.16 30.71,12.57 X3.1
TDI
  Top 0.152: U$11.P$50 30.45,18.2 30.45,14.58 30.96,14.07 X3.2
U1RX  (via drill 0.41)
  Top 0.152: U$11.P$45 22.78,21.32 22.78,20.47 22.17,19.86 v22.17,17.78
  Bottom 0.152: 20.47,13.13 TP8.P$1 20.52,16.13 v22.17,17.78
U1TX  (via drill 0.41)
  Top 0.152: U$11.P$46 23.16,20.99 v23.16,18.8
  Bottom 0.152: TP7.P$1 23.65,18.26 v23.16,18.8

## Text on the board
Route15: FIX / Footprint | FIX / Footprint
Dimension: ADXL78 Location